# Altium PCB H-Bridge v0.1.0.PCBDOC (part 1 of 2)
Units mm, origin at the board's own origin, x right, y up, seen from the top; angles counter-clockwise.
Board outline 152.4 x 152.4 mm, 2 copper layers (Top Layer, Bottom Layer); 182 components, 35 nets, 380 pads, 57 vias.
Unrouted connection lines stored in the file: 2.
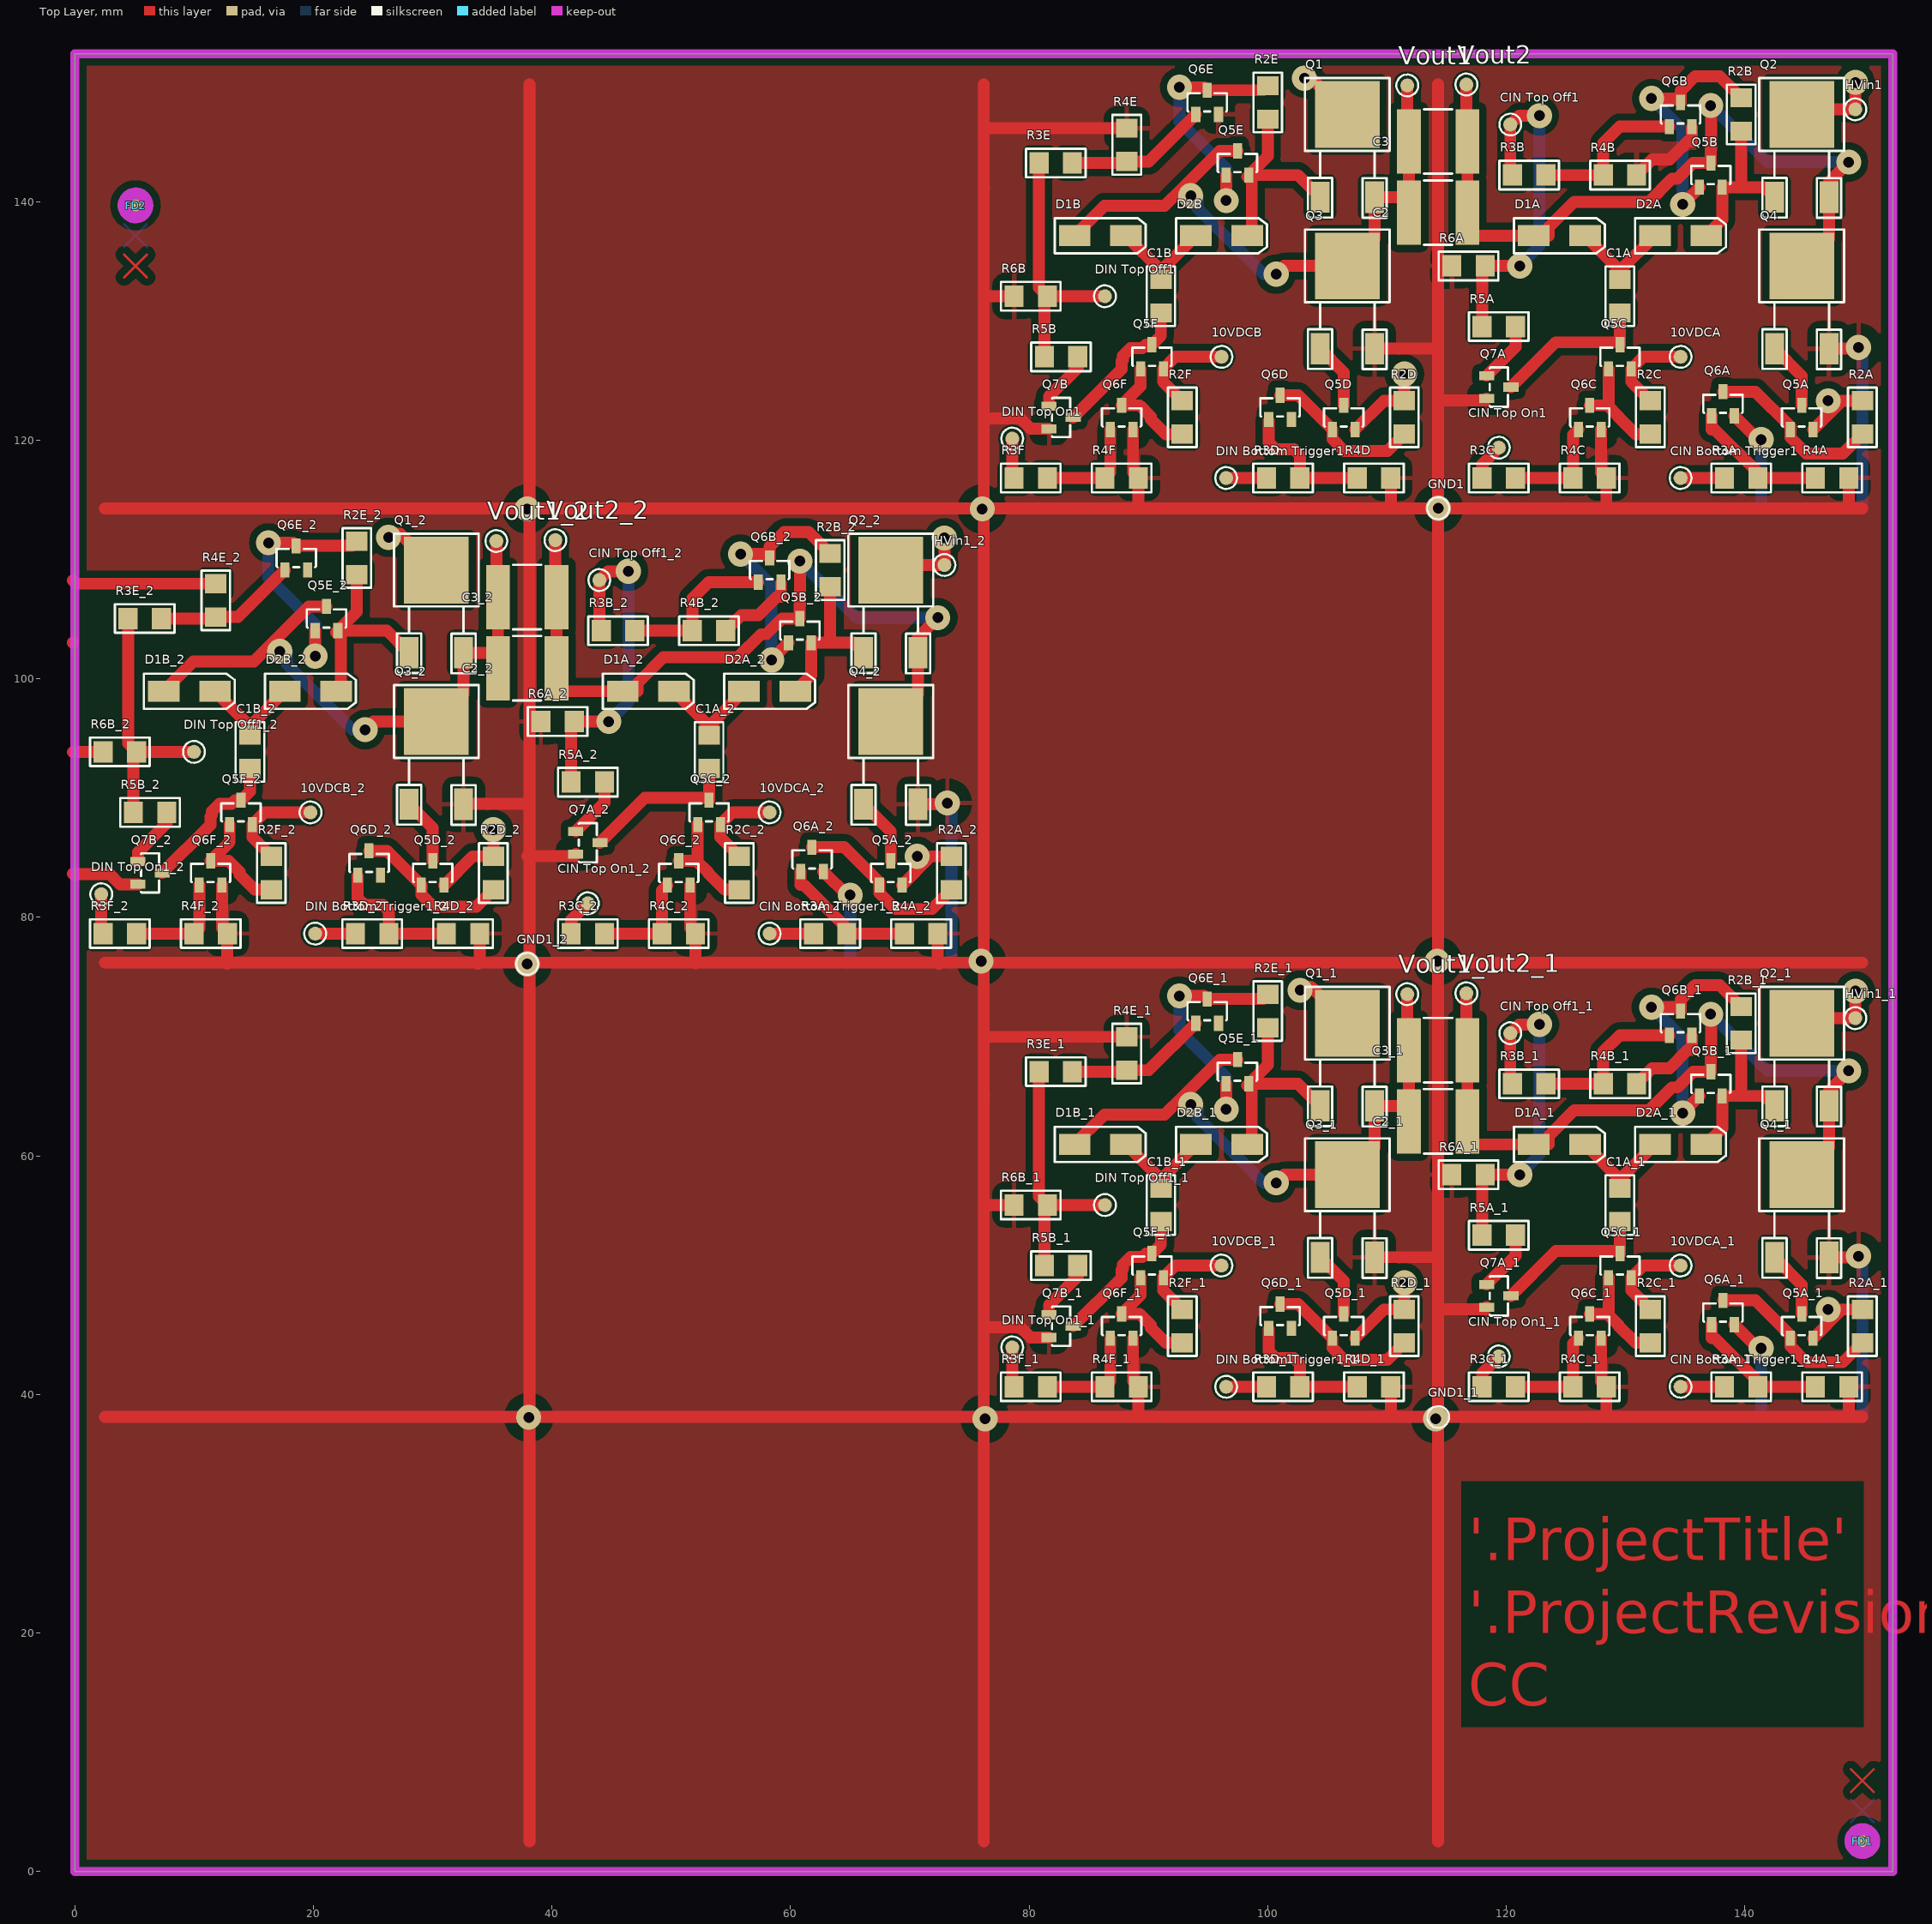
[diagram p0: Top Layer view]
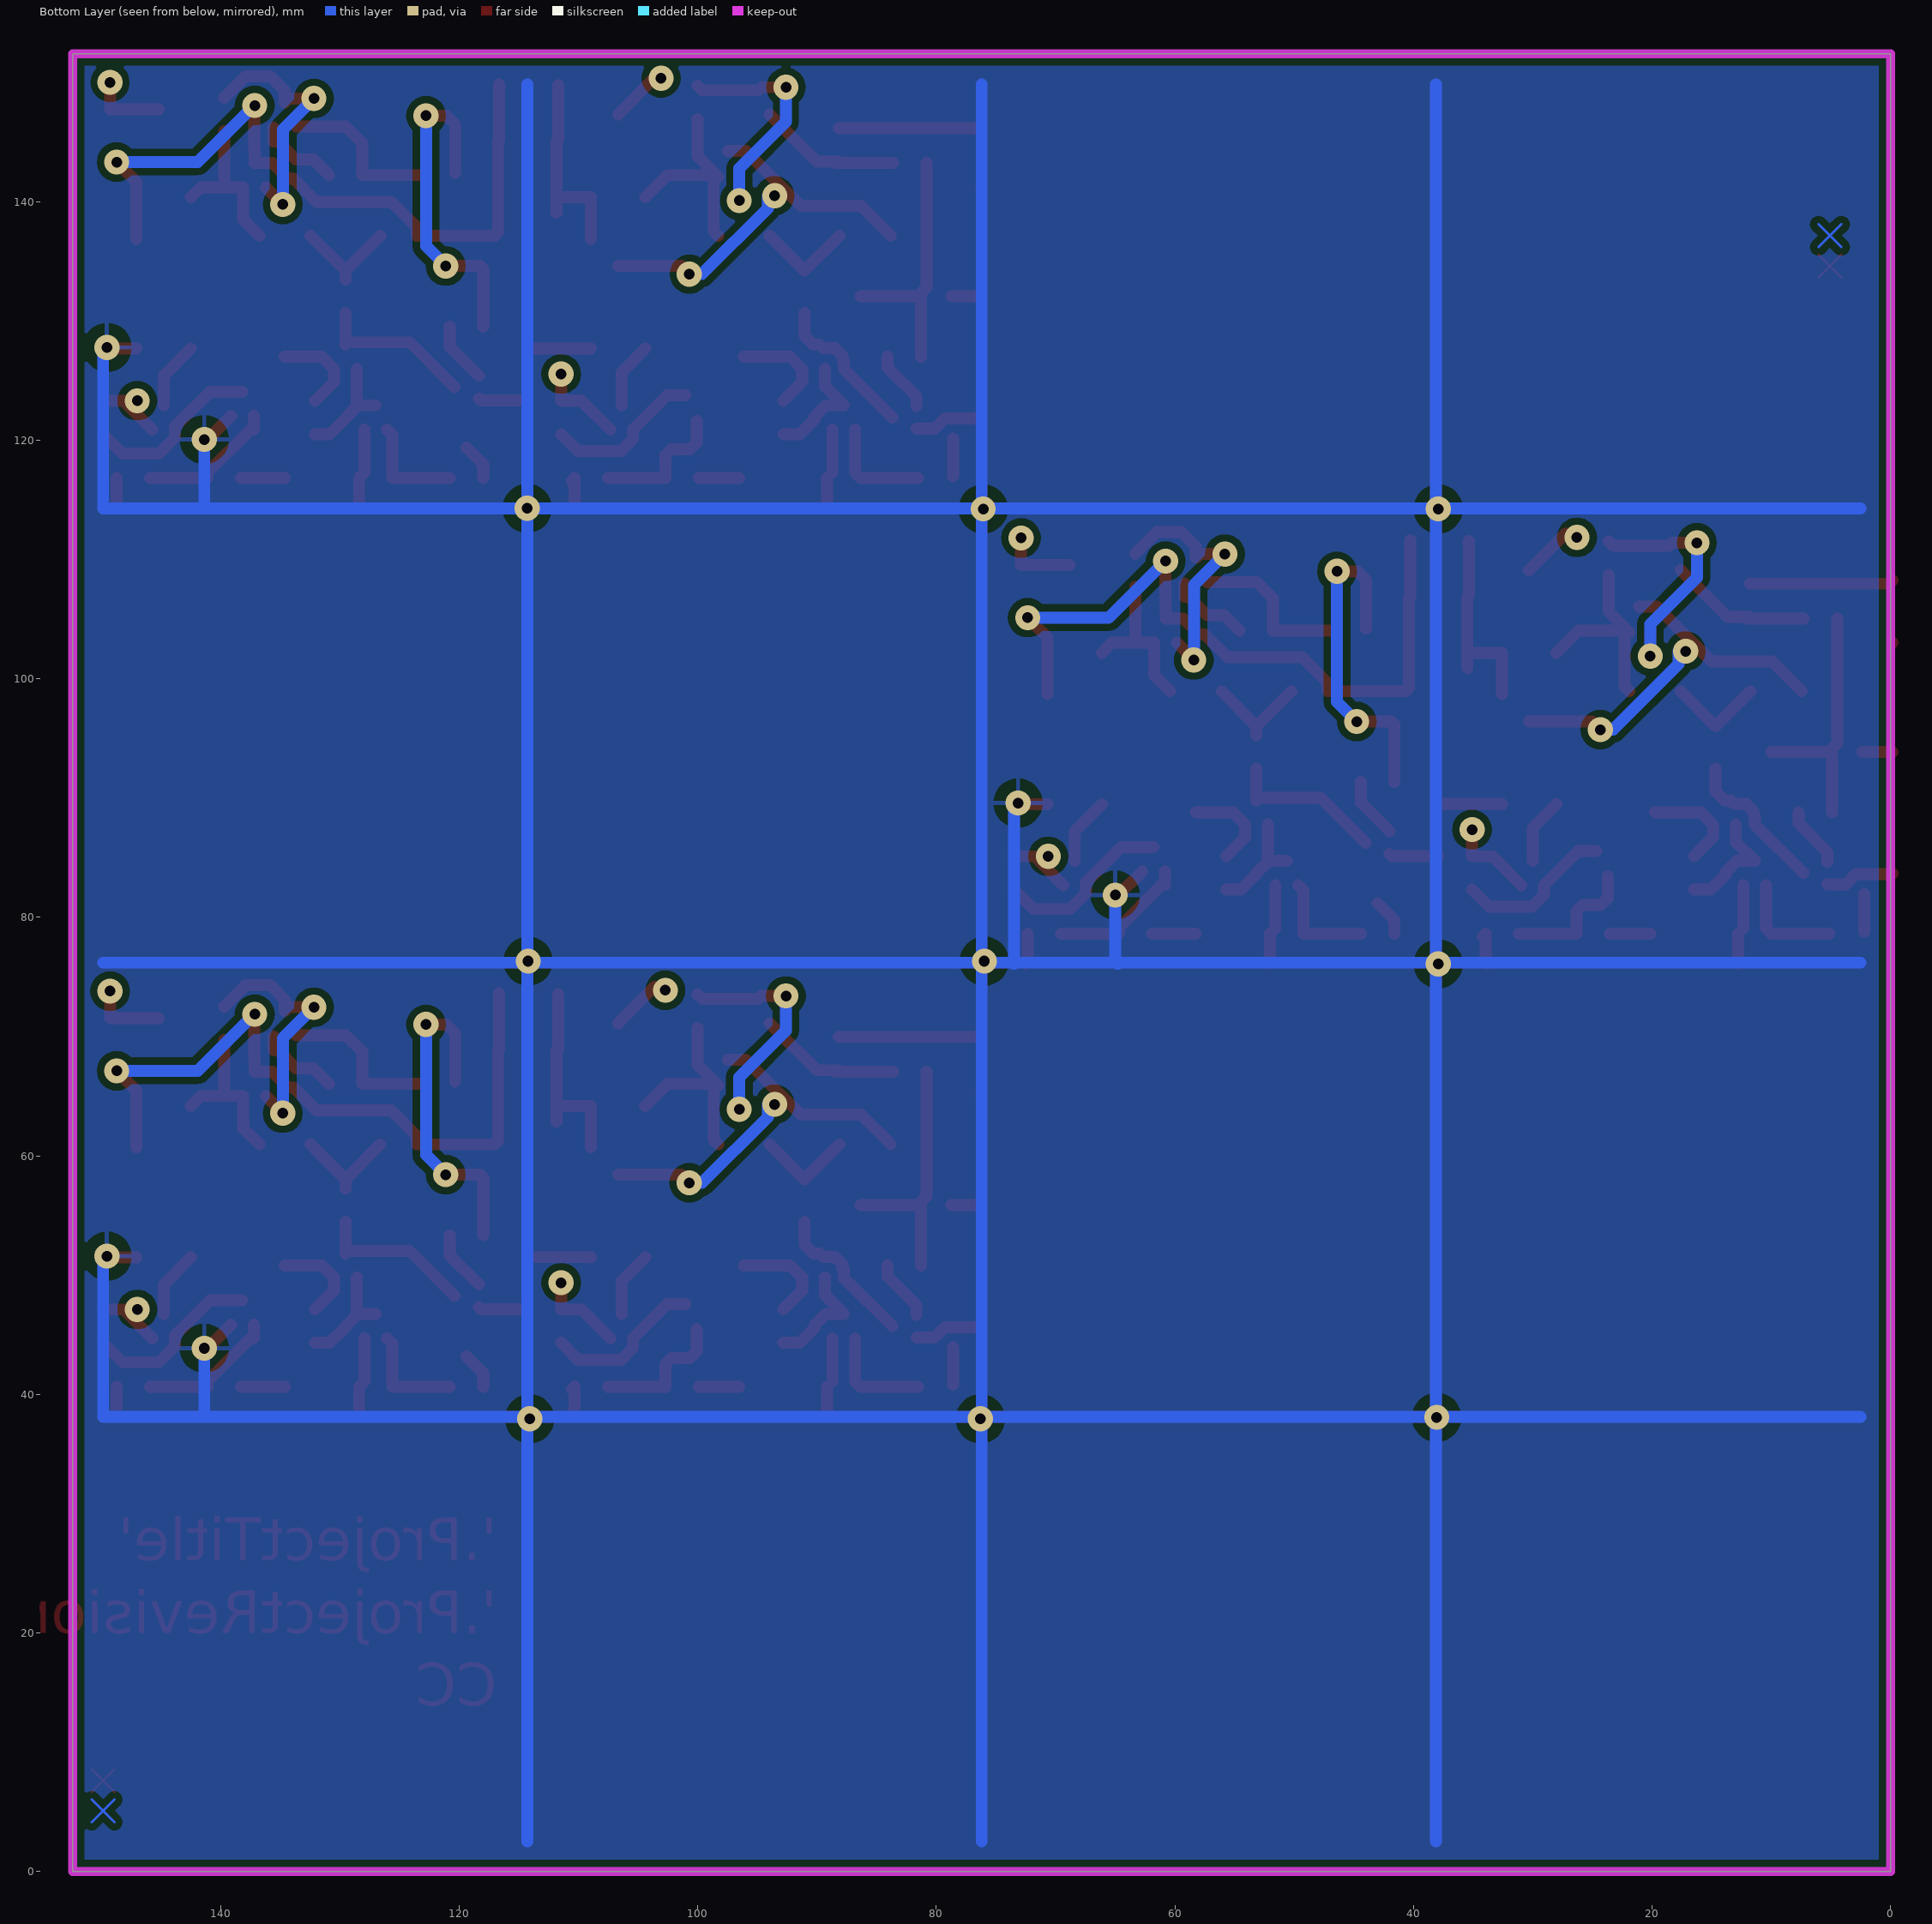
[diagram p1: Bottom Layer view, seen from below]
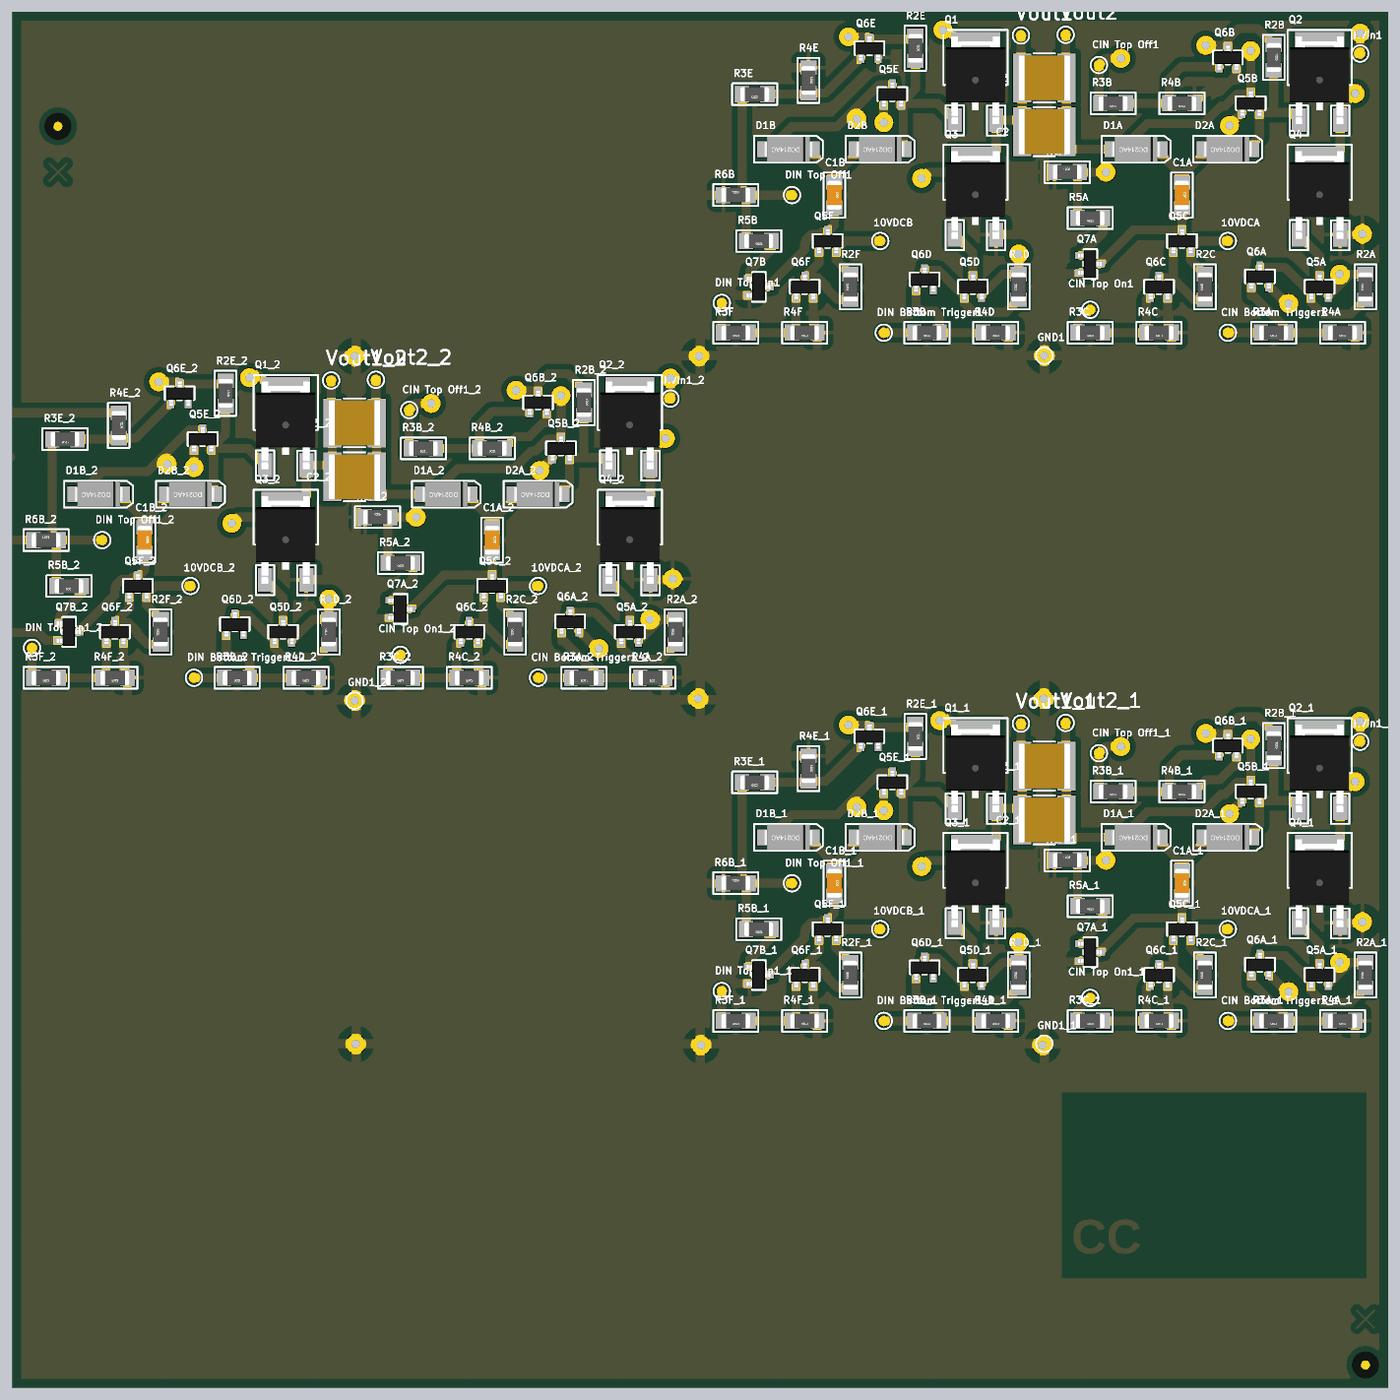
[diagram p3: 3D render of the assembled board from above, using the file's embedded part models]

## Layer stack, top to bottom
Top Solder: solder mask 0.0102, Solder Resist, Dk 3.5
Top Layer: signal copper 0.0356
Dielectric1: core 0.32, FR-4, Dk 4.8
Bottom Layer: signal copper 0.0356
Bottom Solder: solder mask 0.0102, Solder Resist, Dk 3.5

## Board outline
0,0 0,152.4 152.4,152.4 152.4,0

## Design rules (kind name [scope] priority, off if disabled: settings)
AssemblyTestpoint [All] p1: testpointundercomponent=TRUE minsize=1.016 maxsize=2.54 preferedsize=1.524 minholesize=0 maxholesize=1.016 preferedholesize=0.813 testpointgrid=0.025 usegrid=FALSE gridtolerance=0 allowsidebottom=TRUE
Clearance Tracks [All] p1: gap=0.6 ignorepadtopadclearanceinfootprint=FALSE
ComponentClearance "Fiducials and labels" [HasFootprint('Date Code Label') OR HasFootprint('Fiducial - Top Only') or HasFootprint('1 Pin 14-Gauge Wire Connector') OR HasFootprint('1 Pin 22-Gauge Wire Connector')] p1: gap=-25.4 collisioncheckmode=3 verticalgap=0.127 showdistances=TRUE
ComponentClearance Netties [(ObjectKind = 'Component') And (ComponentType = 'Net Tie')] p2: gap=-25.4 collisioncheckmode=3 verticalgap=0.127 showdistances=TRUE
ComponentClearance "Terminal Blocks" [(HasFootprint('TE 796739-2')) vs (HasFootprint('TE 796739-2'))] p3: gap=-25.4 collisioncheckmode=3 verticalgap=0.127 showdistances=TRUE
ComponentClearance [All] p4: gap=0.127 collisioncheckmode=3 verticalgap=0.127 showdistances=TRUE
FabricationTestpoint [All] p1: side=2 testpointundercomponent=TRUE minsize=1.016 maxsize=2.54 preferedsize=1.524 minholesize=0 maxholesize=1.016 preferedholesize=0.813 testpointgrid=0.025 allowsidebottom=TRUE usegrid=FALSE gridtolerance=0
HoleSize "OSH Park Hole Size" [All] p1: absolutevalues=TRUE maxlimit=25.4 minlimit=0.33 maxpercent=80.000 minpercent=20.000
HoleSize "Sunstone Hole Size" [All] p2: absolutevalues=TRUE maxlimit=6.375 minlimit=0.406 maxpercent=80.000 minpercent=20.000
MinimumAnnularRing [All] p1: minimumring=0.127 // OSH Park
MinimumSolderMaskSliver [(InComponentClass('Inside Board Components'))] p1: minsoldermaskwidth=0
PlaneClearance [All] p1: clearance=1
PlaneConnect [All] p1: planeconnectstyle=Relief reliefexpansion=1 reliefentries=4 reliefconductorwidth=1 reliefairgap=1
PolygonConnect [All] p1: connectstyle=Relief reliefconductorwidth=0.381 reliefentries=4 polygonreliefangle="90 Angle" airgapwidth=1
RoomDefinition "High-Side Driver_12" [InComponentClass('High-Side Driver1')] p1: confinementstyle=ConfineIn formatcopy=TRUE lockcomponents=FALSE outline 60.595,77.211 60.595,80.065 61.443,80.065 61.443,85.598 72.055,85.598 72.055,86.445 74.909,86.445 74.909,80.991 73.669,80.991 73.669,77.211
RoomDefinition "High-Side Driver_11" [InComponentClass('High-Side Driver2')] p2: confinementstyle=ConfineIn formatcopy=TRUE lockcomponents=FALSE outline 42.815,102.611 42.815,105.465 56.363,105.465 56.363,110.998 61.895,110.998 61.895,111.845 64.749,111.845 64.749,106.391 62.662,106.391 62.662,102.159 58.903,102.159 58.903,102.611
RoomDefinition "High-Side Driver_10" [InComponentClass('High-Side Driver3')] p3: confinementstyle=ConfineIn formatcopy=TRUE lockcomponents=FALSE outline 40.275,77.211 40.275,80.065 48.743,80.065 48.743,85.598 51.283,85.598 51.283,90.678 55.042,90.678 55.042,86.445 57.129,86.445 57.129,80.991 53.349,80.991 53.349,77.211
RoomDefinition "High-Side Driver_9" [InComponentClass('High-Side Driver4')] p4: confinementstyle=ConfineIn formatcopy=TRUE lockcomponents=FALSE outline 22.195,77.211 22.195,80.065 23.043,80.065 23.043,85.598 33.655,85.598 33.655,86.445 36.509,86.445 36.509,80.991 35.269,80.991 35.269,77.211
RoomDefinition "High-Side Driver_8" [InComponentClass('High-Side Driver5')] p5: confinementstyle=ConfineIn formatcopy=TRUE lockcomponents=FALSE outline 3.128,103.627 3.128,106.481 16.675,106.481 16.675,112.014 22.208,112.014 22.208,112.861 25.062,112.861 25.062,107.407 22.974,107.407 22.974,103.175 19.215,103.175 19.215,103.627
RoomDefinition "High-Side Driver_7" [InComponentClass('High-Side Driver6')] p6: confinementstyle=ConfineIn formatcopy=TRUE lockcomponents=FALSE outline 1.035,77.211 1.035,80.065 9.503,80.065 9.503,85.598 12.043,85.598 12.043,90.678 15.802,90.678 15.802,86.445 17.889,86.445 17.889,80.991 14.109,80.991 14.109,77.211
RoomDefinition "N-FET Driver_4" [InComponentClass('N-FET Driver2')] p7: confinementstyle=ConfineIn formatcopy=TRUE lockcomponents=FALSE outline 5.554,97.206 5.554,100.711 23.791,100.711 23.791,97.206 20.883,97.206 20.883,87.668 18.622,87.668 18.622,91.163 13.256,91.163 13.256,97.206
RoomDefinition "Low-Side Driver_4" [InComponentClass('Low-Side Driver2')] p8: confinementstyle=ConfineIn formatcopy=TRUE lockcomponents=FALSE outline 1.035,92.451 1.035,95.305 6.489,95.305 6.489,90.225 9.029,90.225 9.029,87.371 8.182,87.371 8.182,81.839 4.423,81.839 4.423,87.371 3.575,87.371 3.575,92.451
RoomDefinition "N-FET Driver_3" [InComponentClass('N-FET Driver1')] p9: confinementstyle=ConfineIn formatcopy=TRUE lockcomponents=FALSE outline 44.044,97.206 44.044,100.711 62.281,100.711 62.281,97.206 59.372,97.206 59.372,87.668 57.112,87.668 57.112,91.162 51.746,91.162 51.746,97.206
RoomDefinition "Low-Side Driver_3" [InComponentClass('Low-Side Driver1')] p10: confinementstyle=ConfineIn formatcopy=TRUE lockcomponents=FALSE outline 37.735,94.991 37.735,97.845 43.189,97.845 43.189,92.765 45.729,92.765 45.729,89.911 44.882,89.911 44.882,84.379 41.123,84.379 41.123,89.911 40.275,89.911 40.275,94.991
RoomDefinition "High-Side Driver_6" [InComponentClass('High-Side Driver1')] p11: confinementstyle=ConfineIn formatcopy=TRUE lockcomponents=FALSE outline 136.973,39.213 136.973,42.067 137.82,42.067 137.82,47.6 148.433,47.6 148.433,48.447 151.287,48.447 151.287,42.993 150.047,42.993 150.047,39.213
RoomDefinition "High-Side Driver_5" [InComponentClass('High-Side Driver2')] p12: confinementstyle=ConfineIn formatcopy=TRUE lockcomponents=FALSE outline 119.193,64.613 119.193,67.467 132.74,67.467 132.74,73 138.273,73 138.273,73.847 141.127,73.847 141.127,68.393 139.04,68.393 139.04,64.16 135.28,64.16 135.28,64.613
RoomDefinition "High-Side Driver_4" [InComponentClass('High-Side Driver3')] p13: confinementstyle=ConfineIn formatcopy=TRUE lockcomponents=FALSE outline 116.653,39.213 116.653,42.067 125.12,42.067 125.12,47.6 127.66,47.6 127.66,52.68 131.42,52.68 131.42,48.447 133.507,48.447 133.507,42.993 129.727,42.993 129.727,39.213
RoomDefinition "High-Side Driver_3" [InComponentClass('High-Side Driver4')] p14: confinementstyle=ConfineIn formatcopy=TRUE lockcomponents=FALSE outline 98.573,39.213 98.573,42.067 99.42,42.067 99.42,47.6 110.033,47.6 110.033,48.447 112.887,48.447 112.887,42.993 111.647,42.993 111.647,39.213
RoomDefinition "High-Side Driver_2" [InComponentClass('High-Side Driver5')] p15: confinementstyle=ConfineIn formatcopy=TRUE lockcomponents=FALSE outline 79.506,65.629 79.506,68.483 93.053,68.483 93.053,74.016 98.586,74.016 98.586,74.863 101.439,74.863 101.439,69.409 99.352,69.409 99.352,65.176 95.593,65.176 95.593,65.629
RoomDefinition "High-Side Driver_1" [InComponentClass('High-Side Driver6')] p16: confinementstyle=ConfineIn formatcopy=TRUE lockcomponents=FALSE outline 77.413,39.213 77.413,42.067 85.88,42.067 85.88,47.6 88.42,47.6 88.42,52.68 92.18,52.68 92.18,48.447 94.267,48.447 94.267,42.993 90.487,42.993 90.487,39.213
RoomDefinition "N-FET Driver_2" [InComponentClass('N-FET Driver2')] p17: confinementstyle=ConfineIn formatcopy=TRUE lockcomponents=FALSE outline 81.931,59.207 81.931,62.713 100.169,62.713 100.169,59.207 97.26,59.207 97.26,49.67 95,49.67 95,53.164 89.634,53.164 89.634,59.207
RoomDefinition "Low-Side Driver_2" [InComponentClass('Low-Side Driver2')] p18: confinementstyle=ConfineIn formatcopy=TRUE lockcomponents=FALSE outline 77.413,54.453 77.413,57.307 82.867,57.307 82.867,52.227 85.407,52.227 85.407,49.373 84.56,49.373 84.56,43.84 80.8,43.84 80.8,49.373 79.953,49.373 79.953,54.453
RoomDefinition "N-FET Driver_1" [InComponentClass('N-FET Driver1')] p19: confinementstyle=ConfineIn formatcopy=TRUE lockcomponents=FALSE outline 120.421,59.207 120.421,62.713 138.659,62.713 138.659,59.207 135.75,59.207 135.75,49.67 133.49,49.67 133.49,53.164 128.124,53.164 128.124,59.207
RoomDefinition "Low-Side Driver_1" [InComponentClass('Low-Side Driver1')] p20: confinementstyle=ConfineIn formatcopy=TRUE lockcomponents=FALSE outline 114.113,56.993 114.113,59.847 119.567,59.847 119.567,54.767 122.107,54.767 122.107,51.913 121.26,51.913 121.26,46.38 117.5,46.38 117.5,51.913 116.653,51.913 116.653,56.993
RoomDefinition "Low-Side Driver1" [InComponentClass('Low-Side Driver1')] p21: confinementstyle=ConfineIn formatcopy=TRUE lockcomponents=FALSE outline 114.113,133.193 114.113,136.047 119.567,136.047 119.567,130.967 122.107,130.967 122.107,128.113 121.26,128.113 121.26,122.58 117.5,122.58 117.5,128.113 116.653,128.113 116.653,133.193
RoomDefinition "N-FET Driver1" [InComponentClass('N-FET Driver1')] p22: confinementstyle=ConfineIn formatcopy=TRUE lockcomponents=FALSE outline 120.421,135.407 120.421,138.913 138.659,138.913 138.659,135.407 135.75,135.407 135.75,125.87 133.49,125.87 133.49,129.364 128.124,129.364 128.124,135.407
RoomDefinition "Low-Side Driver2" [InComponentClass('Low-Side Driver2')] p23: confinementstyle=ConfineIn formatcopy=TRUE lockcomponents=FALSE outline 77.413,130.653 77.413,133.507 82.867,133.507 82.867,128.427 85.407,128.427 85.407,125.573 84.56,125.573 84.56,120.04 80.8,120.04 80.8,125.573 79.953,125.573 79.953,130.653
RoomDefinition "N-FET Driver2" [InComponentClass('N-FET Driver2')] p24: confinementstyle=ConfineIn formatcopy=TRUE lockcomponents=FALSE outline 81.931,135.407 81.931,138.913 100.169,138.913 100.169,135.407 97.26,135.407 97.26,125.87 95,125.87 95,129.364 89.634,129.364 89.634,135.407
RoomDefinition "High-Side Driver6" [InComponentClass('High-Side Driver6')] p25: confinementstyle=ConfineIn formatcopy=TRUE lockcomponents=FALSE outline 77.413,115.413 77.413,118.267 85.88,118.267 85.88,123.8 88.42,123.8 88.42,128.88 92.18,128.88 92.18,124.647 94.267,124.647 94.267,119.193 90.487,119.193 90.487,115.413
RoomDefinition "High-Side Driver5" [InComponentClass('High-Side Driver5')] p26: confinementstyle=ConfineIn formatcopy=FALSE lockcomponents=FALSE outline 79.506,141.829 79.506,144.683 93.053,144.683 93.053,150.216 98.586,150.216 98.586,151.063 101.439,151.063 101.439,145.609 99.352,145.609 99.352,141.376 95.593,141.376 95.593,141.829
RoomDefinition "High-Side Driver4" [InComponentClass('High-Side Driver4')] p27: confinementstyle=ConfineIn formatcopy=FALSE lockcomponents=FALSE outline 98.573,115.413 98.573,118.267 99.42,118.267 99.42,123.8 110.033,123.8 110.033,124.647 112.887,124.647 112.887,119.193 111.647,119.193 111.647,115.413
RoomDefinition "High-Side Driver3" [InComponentClass('High-Side Driver3')] p28: confinementstyle=ConfineIn formatcopy=FALSE lockcomponents=FALSE outline 116.653,115.413 116.653,118.267 125.12,118.267 125.12,123.8 127.66,123.8 127.66,128.88 131.42,128.88 131.42,124.647 133.507,124.647 133.507,119.193 129.727,119.193 129.727,115.413
RoomDefinition "High-Side Driver2" [InComponentClass('High-Side Driver2')] p29: confinementstyle=ConfineIn formatcopy=FALSE lockcomponents=FALSE outline 119.193,140.813 119.193,143.667 132.74,143.667 132.74,149.2 138.273,149.2 138.273,150.047 141.127,150.047 141.127,144.593 139.04,144.593 139.04,140.36 135.28,140.36 135.28,140.813
RoomDefinition "High-Side Driver1" [InComponentClass('High-Side Driver1')] p30: confinementstyle=ConfineIn formatcopy=FALSE lockcomponents=FALSE outline 136.973,115.413 136.973,118.267 137.82,118.267 137.82,123.8 148.433,123.8 148.433,124.647 151.287,124.647 151.287,119.193 150.047,119.193 150.047,115.413
RoutingPriority Hi-Power [InNetClass('Hi-Power')] p1: routingpriority=0
RoutingPriority "Non-Hi-Power Tracks" [All] p2: routingpriority=1
RoutingTopology "Analog Routing Topology" [InNet('ANALOG GROUND')] p1: topology=Starburst
RoutingTopology [All] p2: topology=Shortest
RoutingVias "Signal/Power Vias" [All] p1: holewidth=0.9 width=2.1 viastyle="Through Hole" minholewidth=0.9 minwidth=2.1 maxholewidth=0.9 maxwidth=2.1
SMDNeckDown SMDNeckDown_1 [InNetClass('Power')] p1: percent=5000.000
SMDNeckDown [InNetClass('Extreme Hi-Power')] p2: percent=5000.000
SilkToSilkClearance [All] p1: silktosilkclearance=0
SilkToSolderMaskClearance SilkscreenOverComponentPads [IsPad] p1: minsilkscreentomaskgap=0 clearancetoexposedcopper=TRUE
SolderMaskExpansion Vias [IsVia] p1: expansion=-0.051
SolderMaskExpansion "Everything else" [All] p2: expansion=0.102
Width "Signal trace width" [All] p1: maxlimit=1 minlimit=1 preferedwidth=1 checkconnectedcopper=TRUE
19 further rules are at their usual default settings.

## Classes and differential pairs
channel class "N-FET Driver": "N-FET Driver1" "N-FET Driver2"
channel class "Low-Side Driver": "Low-Side Driver1" "Low-Side Driver2"
channel class "High-Side Driver": "High-Side Driver1" "High-Side Driver2" "High-Side Driver3" "High-Side Driver4" "High-Side Driver5" "High-Side Driver6"
net class Power: 10VDC Net10VDCA_1 Net10VDCB_1 NetC1A_2 NetC1B_2 NetQ1_1 NetQ2_1 NetQ3_1 NetQ4_1 VbridgeA VbridgeB
component class "N-FET Driver2": 1B 10VDCB C1B D1B D2B
component class "N-FET Driver1": 1A 10VDCA C1A D1A D2A
component class "Low-Side Driver2": Q7B R5B R6B
component class "Low-Side Driver1": Q7A R5A R6A
component class "High-Side Driver6": Q5F Q6F R2F R3F R4F
component class "High-Side Driver5": Q5E Q6E R2E R3E R4E
component class "High-Side Driver4": Q5D Q6D R2D R3D R4D
component class "High-Side Driver3": Q5C Q6C R2C R3C R4C
component class "High-Side Driver2": Q5B Q6B R2B R3B R4B
component class "High-Side Driver1": Q5A Q6A R2A R3A R4A
component class Overview: C2 C3 "CIN Bottom Trigger1" "CIN Top Off1" "CIN Top On1" "DIN Bottom Trigger1" "DIN Top Off1" "DIN Top On1" FD1 FD2 GND1 HVin1 Q1 Q2 Q3 Q4 Vout1 Vout2

## Components (designator, comment, footprint, x,y, rotation, side; value= is the part's Value field where it differs from the comment)
10VDCA "Test Point" "Test Pad Large" 134.62,127 r0 top (schematic designator 10VDC)
10VDCA_1 "Test Point" "Test Pad Large" 134.62,50.8 r0 top (schematic designator 10VDC)
10VDCA_2 "Test Point" "Test Pad Large" 58.242,88.798 r0 top (schematic designator 10VDC)
10VDCB "Test Point" "Test Pad Large" 96.13,127 r0 top (schematic designator 10VDC)
10VDCB_1 "Test Point" "Test Pad Large" 96.13,50.8 r0 top (schematic designator 10VDC)
10VDCB_2 "Test Point" "Test Pad Large" 19.752,88.798 r0 top (schematic designator 10VDC)
C1A "1206" "Capacitor - 1206 Ceramic" 129.54,132.08 r270 top value="100 nF 50V 1206 X7R 10%" (schematic designator C1)
C1A_1 "1206" "Capacitor - 1206 Ceramic" 129.54,55.88 r270 top value="100 nF 50V 1206 X7R 10%" (schematic designator C1)
C1A_2 "1206" "Capacitor - 1206 Ceramic" 53.162,93.878 r270 top value="100 nF 50V 1206 X7R 10%" (schematic designator C1)
C1B "1206" "Capacitor - 1206 Ceramic" 91.05,132.08 r270 top value="100 nF 50V 1206 X7R 10%" (schematic designator C1)
C1B_1 "1206" "Capacitor - 1206 Ceramic" 91.05,55.88 r270 top value="100 nF 50V 1206 X7R 10%" (schematic designator C1)
C1B_2 "1206" "Capacitor - 1206 Ceramic" 14.672,93.878 r270 top value="100 nF 50V 1206 X7R 10%" (schematic designator C1)
C2 "1uF 2220 450V" "C2220 - CERAMIC" 114.3,139.09 r0 top
C2_1 "1uF 2220 450V" "C2220 - CERAMIC" 114.3,62.89 r0 top (schematic designator C2)
C2_2 "1uF 2220 450V" "C2220 - CERAMIC" 37.922,100.889 r0 top (schematic designator C2)
C3 "1uF 2220 450V" "C2220 - CERAMIC" 114.3,145.059 r0 top
C3_1 "1uF 2220 450V" "C2220 - CERAMIC" 114.3,68.859 r0 top (schematic designator C3)
C3_2 "1uF 2220 450V" "C2220 - CERAMIC" 37.922,106.858 r0 top (schematic designator C3)
"CIN Bottom Trigger1" "Test Point" "Test Pad Large" 134.62,116.84 r90 top
"CIN Bottom Trigger1_1" "Test Point" "Test Pad Large" 134.62,40.64 r90 top (schematic designator "CIN Bottom Trigger1")
"CIN Bottom Trigger1_2" "Test Point" "Test Pad Large" 58.242,78.638 r90 top (schematic designator "CIN Bottom Trigger1")
"CIN Top Off1" "Test Point" "Test Pad Large" 120.345,146.482 r90 top
"CIN Top Off1_1" "Test Point" "Test Pad Large" 120.345,70.282 r90 top (schematic designator "CIN Top Off1")
"CIN Top Off1_2" "Test Point" "Test Pad Large" 43.967,108.28 r90 top (schematic designator "CIN Top Off1")
"CIN Top On1" "Test Point" "Test Pad Large" 119.38,119.38 r90 top
"CIN Top On1_1" "Test Point" "Test Pad Large" 119.38,43.18 r90 top (schematic designator "CIN Top On1")
"CIN Top On1_2" "Test Point" "Test Pad Large" 43.002,81.178 r90 top (schematic designator "CIN Top On1")
D1A "Diode - Signal 1A" "SMA - Diode" 124.46,137.16 r0 top value="Signal Diode" (schematic designator D1)
D1A_1 "Diode - Signal 1A" "SMA - Diode" 124.46,60.96 r0 top value="Signal Diode" (schematic designator D1)
D1A_2 "Diode - Signal 1A" "SMA - Diode" 48.082,98.958 r0 top value="Signal Diode" (schematic designator D1)
D1B "Diode - Signal 1A" "SMA - Diode" 85.97,137.16 r0 top value="Signal Diode" (schematic designator D1)
D1B_1 "Diode - Signal 1A" "SMA - Diode" 85.97,60.96 r0 top value="Signal Diode" (schematic designator D1)
D1B_2 "Diode - Signal 1A" "SMA - Diode" 9.592,98.958 r0 top value="Signal Diode" (schematic designator D1)
D2A "Diode - Signal 1A" "SMA - Diode" 134.62,137.16 r0 top value="Signal Diode" (schematic designator D2)
D2A_1 "Diode - Signal 1A" "SMA - Diode" 134.62,60.96 r0 top value="Signal Diode" (schematic designator D2)
D2A_2 "Diode - Signal 1A" "SMA - Diode" 58.242,98.958 r0 top value="Signal Diode" (schematic designator D2)
D2B "Diode - Signal 1A" "SMA - Diode" 96.13,137.16 r0 top value="Signal Diode" (schematic designator D2)
D2B_1 "Diode - Signal 1A" "SMA - Diode" 96.13,60.96 r0 top value="Signal Diode" (schematic designator D2)
D2B_2 "Diode - Signal 1A" "SMA - Diode" 19.752,98.958 r0 top value="Signal Diode" (schematic designator D2)
"DIN Bottom Trigger1" "Test Point" "Test Pad Large" 96.52,116.84 r90 top
"DIN Bottom Trigger1_1" "Test Point" "Test Pad Large" 96.52,40.64 r90 top (schematic designator "DIN Bottom Trigger1")
"DIN Bottom Trigger1_2" "Test Point" "Test Pad Large" 20.142,78.638 r90 top (schematic designator "DIN Bottom Trigger1")
"DIN Top Off1" "Test Point" "Test Pad Large" 86.36,132.08 r90 top
"DIN Top Off1_1" "Test Point" "Test Pad Large" 86.36,55.88 r90 top (schematic designator "DIN Top Off1")
"DIN Top Off1_2" "Test Point" "Test Pad Large" 9.982,93.878 r90 top (schematic designator "DIN Top Off1")
"DIN Top On1" "Test Point" "Test Pad Large" 78.588,120.142 r90 top
"DIN Top On1_1" "Test Point" "Test Pad Large" 78.588,43.942 r90 top (schematic designator "DIN Top On1")
"DIN Top On1_2" "Test Point" "Test Pad Large" 2.21,81.94 r90 top (schematic designator "DIN Top On1")
FD1 "Fiducials" "Fiducial - Top Only" 149.86,2.54 r0 top locked
FD2 "Fiducial, Top Only" "Fiducial - Top Only" 5.08,139.7 r0 top locked
GND1 "Test Point" "Test Pad Large" 114.3,114.3 r90 top
GND1_1 "Test Point" "Test Pad Large" 114.3,38.1 r90 top (schematic designator GND1)
GND1_2 "Test Point" "Test Pad Large" 37.922,76.098 r90 top (schematic designator GND1)
HVin1 "Test Point" "Test Pad Large" 149.276,147.752 r90 top
HVin1_1 "Test Point" "Test Pad Large" 149.276,71.552 r90 top (schematic designator HVin1)
HVin1_2 "Test Point" "Test Pad Large" 72.898,109.55 r90 top (schematic designator HVin1)
Q1 "N-MOSFET 420mR 250V" DPAK 106.68,147.32 r0 top
Q1_1 "N-MOSFET 420mR 250V" DPAK 106.68,71.12 r0 top (schematic designator Q1)
Q1_2 "N-MOSFET 420mR 250V" DPAK 30.302,109.118 r0 top (schematic designator Q1)
Q2 "N-MOSFET 420mR 250V" DPAK 144.78,147.32 r0 top
Q2_1 "N-MOSFET 420mR 250V" DPAK 144.78,71.12 r0 top (schematic designator Q2)
Q2_2 "N-MOSFET 420mR 250V" DPAK 68.402,109.118 r0 top (schematic designator Q2)
Q3 "N-MOSFET 420mR 250V" DPAK 106.68,134.62 r0 top
Q3_1 "N-MOSFET 420mR 250V" DPAK 106.68,58.42 r0 top (schematic designator Q3)
Q3_2 "N-MOSFET 420mR 250V" DPAK 30.302,96.418 r0 top (schematic designator Q3)
Q4 "N-MOSFET 420mR 250V" DPAK 144.78,134.62 r0 top
Q4_1 "N-MOSFET 420mR 250V" DPAK 144.78,58.42 r0 top (schematic designator Q4)
Q4_2 "N-MOSFET 420mR 250V" DPAK 68.402,96.418 r0 top (schematic designator Q4)
Q5A "P-FET" "SOT23 - 3 pin" 144.78,121.92 r0 top value="P Channel MOSFET" (schematic designator Q5)
Q5A_1 "P-FET" "SOT23 - 3 pin" 144.78,45.72 r0 top value="P Channel MOSFET" (schematic designator Q5)
Q5A_2 "P-FET" "SOT23 - 3 pin" 68.402,83.718 r0 top value="P Channel MOSFET" (schematic designator Q5)
Q5B "P-FET" "SOT23 - 3 pin" 137.16,142.24 r0 top value="P Channel MOSFET" (schematic designator Q5)
Q5B_1 "P-FET" "SOT23 - 3 pin" 137.16,66.04 r0 top value="P Channel MOSFET" (schematic designator Q5)
Q5B_2 "P-FET" "SOT23 - 3 pin" 60.782,104.038 r0 top value="P Channel MOSFET" (schematic designator Q5)
Q5C "P-FET" "SOT23 - 3 pin" 129.54,127 r0 top value="P Channel MOSFET" (schematic designator Q5)
Q5C_1 "P-FET" "SOT23 - 3 pin" 129.54,50.8 r0 top value="P Channel MOSFET" (schematic designator Q5)
Q5C_2 "P-FET" "SOT23 - 3 pin" 53.162,88.798 r0 top value="P Channel MOSFET" (schematic designator Q5)
Q5D "P-FET" "SOT23 - 3 pin" 106.38,121.92 r0 top value="P Channel MOSFET" (schematic designator Q5)
Q5D_1 "P-FET" "SOT23 - 3 pin" 106.38,45.72 r0 top value="P Channel MOSFET" (schematic designator Q5)
Q5D_2 "P-FET" "SOT23 - 3 pin" 30.002,83.718 r0 top value="P Channel MOSFET" (schematic designator Q5)
Q5E "P-FET" "SOT23 - 3 pin" 97.473,143.256 r0 top value="P Channel MOSFET" (schematic designator Q5)
Q5E_1 "P-FET" "SOT23 - 3 pin" 97.473,67.056 r0 top value="P Channel MOSFET" (schematic designator Q5)
Q5E_2 "P-FET" "SOT23 - 3 pin" 21.095,105.054 r0 top value="P Channel MOSFET" (schematic designator Q5)
Q5F "P-FET" "SOT23 - 3 pin" 90.3,127 r0 top value="P Channel MOSFET" (schematic designator Q5)
Q5F_1 "P-FET" "SOT23 - 3 pin" 90.3,50.8 r0 top value="P Channel MOSFET" (schematic designator Q5)
Q5F_2 "P-FET" "SOT23 - 3 pin" 13.922,88.798 r0 top value="P Channel MOSFET" (schematic designator Q5)
Q6A "N-FET" "SOT23 - 3 pin" 138.176,123.063 r0 top value="N Channel MOSFET" (schematic designator Q6)
Q6A_1 "N-FET" "SOT23 - 3 pin" 138.176,46.863 r0 top value="N Channel MOSFET" (schematic designator Q6)
Q6A_2 "N-FET" "SOT23 - 3 pin" 61.798,84.861 r0 top value="N Channel MOSFET" (schematic designator Q6)
Q6B "N-FET" "SOT23 - 3 pin" 134.62,147.32 r0 top value="N Channel MOSFET" (schematic designator Q6)
Q6B_1 "N-FET" "SOT23 - 3 pin" 134.62,71.12 r0 top value="N Channel MOSFET" (schematic designator Q6)
Q6B_2 "N-FET" "SOT23 - 3 pin" 58.242,109.118 r0 top value="N Channel MOSFET" (schematic designator Q6)
Q6C "N-FET" "SOT23 - 3 pin" 127,121.92 r0 top value="N Channel MOSFET" (schematic designator Q6)
Q6C_1 "N-FET" "SOT23 - 3 pin" 127,45.72 r0 top value="N Channel MOSFET" (schematic designator Q6)
Q6C_2 "N-FET" "SOT23 - 3 pin" 50.622,83.718 r0 top value="N Channel MOSFET" (schematic designator Q6)
Q6D "N-FET" "SOT23 - 3 pin" 101.041,122.758 r0 top value="N Channel MOSFET" (schematic designator Q6)
Q6D_1 "N-FET" "SOT23 - 3 pin" 101.041,46.558 r0 top value="N Channel MOSFET" (schematic designator Q6)
Q6D_2 "N-FET" "SOT23 - 3 pin" 24.663,84.557 r0 top value="N Channel MOSFET" (schematic designator Q6)
Q6E "N-FET" "SOT23 - 3 pin" 94.933,148.336 r0 top value="N Channel MOSFET" (schematic designator Q6)
Q6E_1 "N-FET" "SOT23 - 3 pin" 94.933,72.136 r0 top value="N Channel MOSFET" (schematic designator Q6)
Q6E_2 "N-FET" "SOT23 - 3 pin" 18.555,110.134 r0 top value="N Channel MOSFET" (schematic designator Q6)
Q6F "N-FET" "SOT23 - 3 pin" 87.76,121.92 r0 top value="N Channel MOSFET" (schematic designator Q6)
Q6F_1 "N-FET" "SOT23 - 3 pin" 87.76,45.72 r0 top value="N Channel MOSFET" (schematic designator Q6)
Q6F_2 "N-FET" "SOT23 - 3 pin" 11.382,83.718 r0 top value="N Channel MOSFET" (schematic designator Q6)
Q7A "N-FET" "SOT23 - 3 pin" 119.38,124.46 r270 top value="N Channel MOSFET" (schematic designator Q7)
Q7A_1 "N-FET" "SOT23 - 3 pin" 119.38,48.26 r270 top value="N Channel MOSFET" (schematic designator Q7)
Q7A_2 "N-FET" "SOT23 - 3 pin" 43.002,86.258 r270 top value="N Channel MOSFET" (schematic designator Q7)
Q7B "N-FET" "SOT23 - 3 pin" 82.68,121.92 r270 top value="N Channel MOSFET" (schematic designator Q7)
Q7B_1 "N-FET" "SOT23 - 3 pin" 82.68,45.72 r270 top value="N Channel MOSFET" (schematic designator Q7)
Q7B_2 "N-FET" "SOT23 - 3 pin" 6.302,83.718 r270 top value="N Channel MOSFET" (schematic designator Q7)
R2A "" "Resistor - 1206" 149.86,121.92 r270 top value="10k 1206 1%" (schematic designator R2)
R2A_1 "" "Resistor - 1206" 149.86,45.72 r270 top value="10k 1206 1%" (schematic designator R2)
R2A_2 "" "Resistor - 1206" 73.482,83.718 r270 top value="10k 1206 1%" (schematic designator R2)
R2B "" "Resistor - 1206" 139.7,147.32 r90 top value="10k 1206 1%" (schematic designator R2)
R2B_1 "" "Resistor - 1206" 139.7,71.12 r90 top value="10k 1206 1%" (schematic designator R2)
R2B_2 "" "Resistor - 1206" 63.322,109.118 r90 top value="10k 1206 1%" (schematic designator R2)
R2C "" "Resistor - 1206" 132.08,121.92 r270 top value="10k 1206 1%" (schematic designator R2)
R2C_1 "" "Resistor - 1206" 132.08,45.72 r270 top value="10k 1206 1%" (schematic designator R2)
R2C_2 "" "Resistor - 1206" 55.702,83.718 r270 top value="10k 1206 1%" (schematic designator R2)
R2D "" "Resistor - 1206" 111.46,121.92 r270 top value="10k 1206 1%" (schematic designator R2)
R2D_1 "" "Resistor - 1206" 111.46,45.72 r270 top value="10k 1206 1%" (schematic designator R2)
R2D_2 "" "Resistor - 1206" 35.082,83.718 r270 top value="10k 1206 1%" (schematic designator R2)
R2E "" "Resistor - 1206" 100.013,148.336 r90 top value="10k 1206 1%" (schematic designator R2)
R2E_1 "" "Resistor - 1206" 100.013,72.136 r90 top value="10k 1206 1%" (schematic designator R2)
R2E_2 "" "Resistor - 1206" 23.635,110.134 r90 top value="10k 1206 1%" (schematic designator R2)
R2F "" "Resistor - 1206" 92.84,121.92 r270 top value="10k 1206 1%" (schematic designator R2)
R2F_1 "" "Resistor - 1206" 92.84,45.72 r270 top value="10k 1206 1%" (schematic designator R2)
R2F_2 "" "Resistor - 1206" 16.462,83.718 r270 top value="10k 1206 1%" (schematic designator R2)
R3A "2k 1206 5%" "Resistor - 1206" 139.7,116.84 r0 top (schematic designator R3)
R3A_1 "2k 1206 5%" "Resistor - 1206" 139.7,40.64 r0 top (schematic designator R3)
R3A_2 "2k 1206 5%" "Resistor - 1206" 63.322,78.638 r0 top (schematic designator R3)
R3B "2k 1206 5%" "Resistor - 1206" 121.92,142.24 r0 top (schematic designator R3)
R3B_1 "2k 1206 5%" "Resistor - 1206" 121.92,66.04 r0 top (schematic designator R3)
R3B_2 "2k 1206 5%" "Resistor - 1206" 45.542,104.038 r0 top (schematic designator R3)
R3C "2k 1206 5%" "Resistor - 1206" 119.38,116.84 r0 top (schematic designator R3)
R3C_1 "2k 1206 5%" "Resistor - 1206" 119.38,40.64 r0 top (schematic designator R3)
R3C_2 "2k 1206 5%" "Resistor - 1206" 43.002,78.638 r0 top (schematic designator R3)
R3D "2k 1206 5%" "Resistor - 1206" 101.3,116.84 r0 top (schematic designator R3)
R3D_1 "2k 1206 5%" "Resistor - 1206" 101.3,40.64 r0 top (schematic designator R3)
R3D_2 "2k 1206 5%" "Resistor - 1206" 24.922,78.638 r0 top (schematic designator R3)
R3E "2k 1206 5%" "Resistor - 1206" 82.233,143.256 r0 top (schematic designator R3)
R3E_1 "2k 1206 5%" "Resistor - 1206" 82.233,67.056 r0 top (schematic designator R3)
R3E_2 "2k 1206 5%" "Resistor - 1206" 5.855,105.054 r0 top (schematic designator R3)
R3F "2k 1206 5%" "Resistor - 1206" 80.14,116.84 r0 top (schematic designator R3)
R3F_1 "2k 1206 5%" "Resistor - 1206" 80.14,40.64 r0 top (schematic designator R3)
R3F_2 "2k 1206 5%" "Resistor - 1206" 3.762,78.638 r0 top (schematic designator R3)
R4A "" "Resistor - 1206" 147.32,116.84 r0 top value="10k 1206 1%" (schematic designator R4)
R4A_1 "" "Resistor - 1206" 147.32,40.64 r0 top value="10k 1206 1%" (schematic designator R4)
R4A_2 "" "Resistor - 1206" 70.942,78.638 r0 top value="10k 1206 1%" (schematic designator R4)
R4B "" "Resistor - 1206" 129.54,142.24 r0 top value="10k 1206 1%" (schematic designator R4)
R4B_1 "" "Resistor - 1206" 129.54,66.04 r0 top value="10k 1206 1%" (schematic designator R4)
R4B_2 "" "Resistor - 1206" 53.162,104.038 r0 top value="10k 1206 1%" (schematic designator R4)
R4C "" "Resistor - 1206" 127,116.84 r0 top value="10k 1206 1%" (schematic designator R4)
R4C_1 "" "Resistor - 1206" 127,40.64 r0 top value="10k 1206 1%" (schematic designator R4)
R4C_2 "" "Resistor - 1206" 50.622,78.638 r0 top value="10k 1206 1%" (schematic designator R4)
R4D "" "Resistor - 1206" 108.92,116.84 r0 top value="10k 1206 1%" (schematic designator R4)
R4D_1 "" "Resistor - 1206" 108.92,40.64 r0 top value="10k 1206 1%" (schematic designator R4)
R4D_2 "" "Resistor - 1206" 32.542,78.638 r0 top value="10k 1206 1%" (schematic designator R4)
R4E "" "Resistor - 1206" 88.189,144.78 r90 top value="10k 1206 1%" (schematic designator R4)
R4E_1 "" "Resistor - 1206" 88.189,68.58 r90 top value="10k 1206 1%" (schematic designator R4)
R4E_2 "" "Resistor - 1206" 11.811,106.578 r90 top value="10k 1206 1%" (schematic designator R4)
R4F "" "Resistor - 1206" 87.76,116.84 r0 top value="10k 1206 1%" (schematic designator R4)
R4F_1 "" "Resistor - 1206" 87.76,40.64 r0 top value="10k 1206 1%" (schematic designator R4)
R4F_2 "" "Resistor - 1206" 11.382,78.638 r0 top value="10k 1206 1%" (schematic designator R4)
R5A "2k 1206 5%" "Resistor - 1206" 119.38,129.54 r0 top (schematic designator R5)
R5A_1 "2k 1206 5%" "Resistor - 1206" 119.38,53.34 r0 top (schematic designator R5)
R5A_2 "2k 1206 5%" "Resistor - 1206" 43.002,91.338 r0 top (schematic designator R5)
R5B "2k 1206 5%" "Resistor - 1206" 82.68,127 r0 top (schematic designator R5)
R5B_1 "2k 1206 5%" "Resistor - 1206" 82.68,50.8 r0 top (schematic designator R5)
R5B_2 "2k 1206 5%" "Resistor - 1206" 6.302,88.798 r0 top (schematic designator R5)
R6A "" "Resistor - 1206" 116.84,134.62 r180 top value="10k 1206 1%" (schematic designator R6)
R6A_1 "" "Resistor - 1206" 116.84,58.42 r180 top value="10k 1206 1%" (schematic designator R6)
R6A_2 "" "Resistor - 1206" 40.462,96.418 r180 top value="10k 1206 1%" (schematic designator R6)
R6B "" "Resistor - 1206" 80.14,132.08 r180 top value="10k 1206 1%" (schematic designator R6)
R6B_1 "" "Resistor - 1206" 80.14,55.88 r180 top value="10k 1206 1%" (schematic designator R6)
R6B_2 "" "Resistor - 1206" 3.762,93.878 r180 top value="10k 1206 1%" (schematic designator R6)
Vout1 "Test Point" "Test Pad Large" 111.709,149.758 r90 top
Vout1_1 "Test Point" "Test Pad Large" 111.709,73.558 r90 top (schematic designator Vout1)
Vout1_2 "Test Point" "Test Pad Large" 35.331,111.557 r90 top (schematic designator Vout1)
Vout2 "Test Point" "Test Pad Large" 116.662,149.835 r90 top
Vout2_1 "Test Point" "Test Pad Large" 116.662,73.635 r90 top (schematic designator Vout2)
Vout2_2 "Test Point" "Test Pad Large" 40.284,111.633 r90 top (schematic designator Vout2)

## Footprints (in the part's own frame and the unit in brackets; to place one, negate y for a bottom-side part, rotate by r counter-clockwise, add the part's x,y. Pads: shape width x height; smd on the part's side, far side on the other; paste and mask are expansions set on the pad)
"C2220 - CERAMIC" [mm] "Chip Capacitor, 2-Leads, Body 5.75x5.00mm, IPC Medium Density"
  rect 2x5.4 smd: 1(-2.45,0) 2(2.45,0)
  silkscreen extent -1.19,-2.7 1.17,2.7, body extent -2.85,-2.5 2.85,2.5, height 2.3
"Capacitor - 1206 Ceramic" [mm] "IPC-SM-782 Compliant - Rev A 2016-04-08"
  rrect0% 1.6x1.8 smd: 1(-1.4,0) 2(1.4,0)
  silkscreen extent -2.5,-1.2 2.5,1.2, body extent -1.6,-0.8 1.6,0.8, height 1
DPAK [mil]
  rect 62x103 smd: 1(-90,-273)
  rect 214x220 smd: 2(0,0)
  rect 62x104 smd: 3(90,-273)
  silkscreen extent -140,-341 140,120, body extent -130,-291 129,91, height 91
"Fiducial - Top Only" [mm] "Single sided"
  round 1 smd paste-1.016 mask+1: 0(0,0)
  Top Layer keep-out circle w1: c0,0 r1
"Resistor - 1206" [mm] "IPC-SM-782 Compliant - Rev A 2016-04-08"
  rrect0% 1.6x1.8 smd: 1(-1.4,0) 2(1.4,0)
  silkscreen extent -2.5,-1.2 2.5,1.2, body extent -1.6,-0.81 1.6,0.79, height 1
"SMA - Diode" [mm]
  rect 2.65x1.75 smd: 1(-2.15,0) 2(2.15,0)
  silkscreen extent -3.81,-1.48 3.81,1.48, body extent -2.74,-1.4 2.74,1.4, height 2.29
"SOT23 - 3 pin" [mil]
  rect 30x50 smd: 1(-37.5,-40) 2(37.5,-40) 3(0,40)
  silkscreen extent -65,-30 65,30, body extent -58,-53 60,51, height 43
"Test Pad Large" [mil] "Test Probe Pad"
  round 46 smd paste-393.7: 1(0,0)
  silkscreen extent -36,-36 36,36